# Altium PCB CareBoard_SMD_AUTOROUTER.PcbDoc
Units mil, origin at the board's own origin, x right, y up, seen from the top; angles counter-clockwise.
Board outline 6840 x 2601.5 mil, 2 copper layers (Top Layer, Bottom Layer); 72 components, 62 nets, 308 pads, 94 vias.
Unrouted connection lines stored in the file: 3.
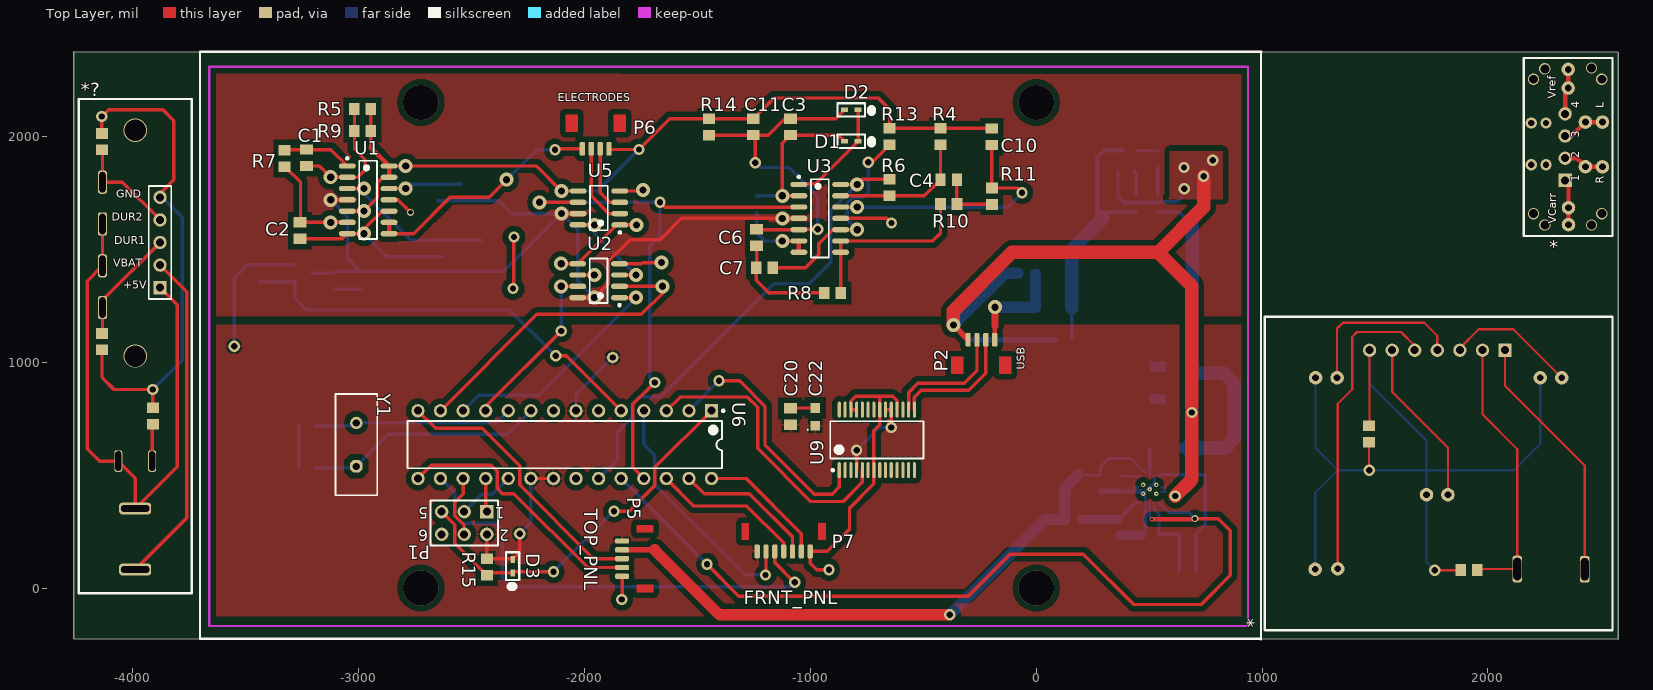
[diagram p0: Top Layer view]
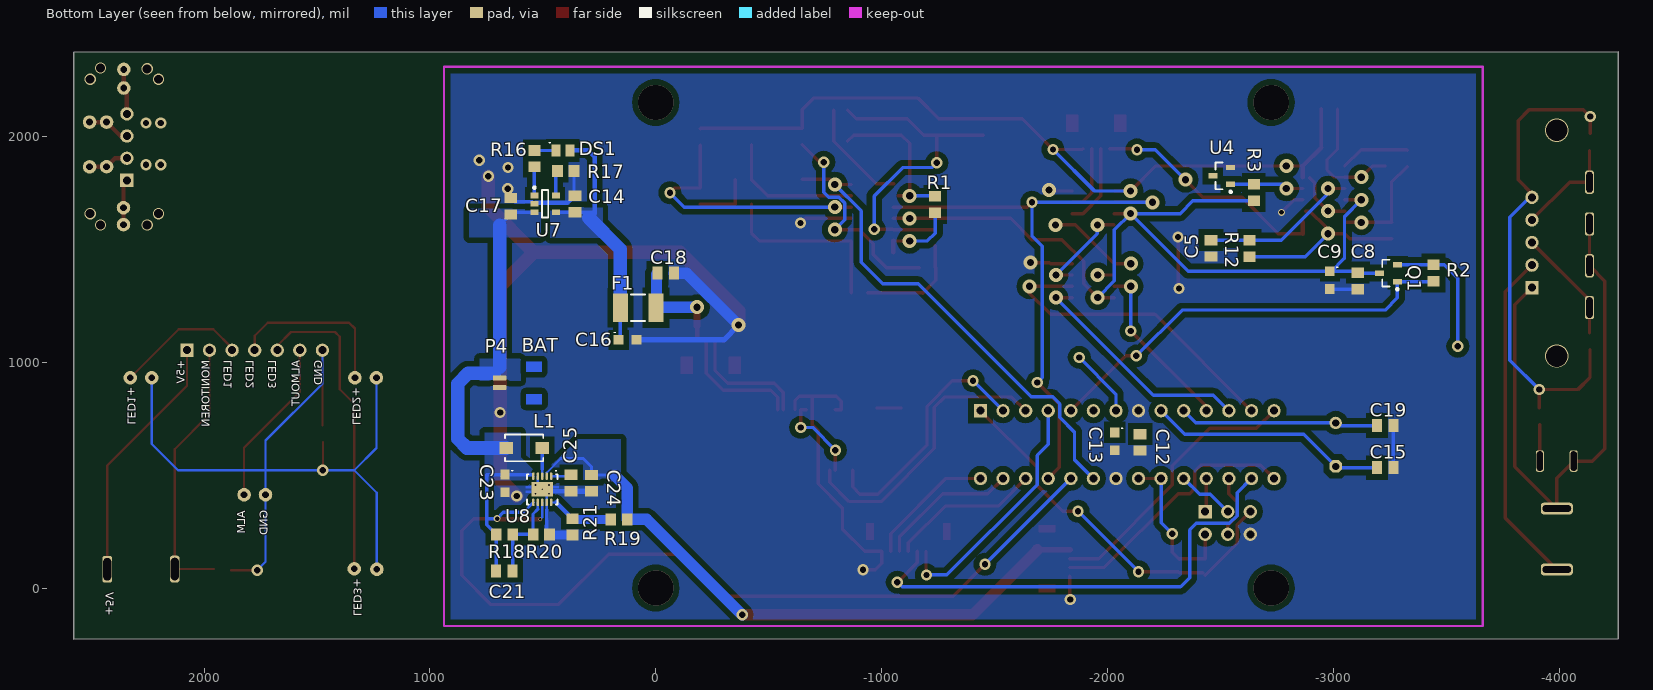
[diagram p1: Bottom Layer view, seen from below]

## Layer stack, top to bottom
Top Layer: signal copper 1.4
Dielectric: dielectric 12.6, FR-4, Dk 4.8
Bottom Layer: signal copper 1.4

## Board outline
-4262.5,-225 2577.5,-227.5 2577.5,2371.5 -4262.5,2374

## Design rules (kind name [scope] priority, off if disabled: settings)
Clearance Clearance_1 [All vs InPolygon] p1: gap=25
Clearance [All] p2: gap=5
ComponentClearance [All] p1: gap=20 collisioncheckmode=3 verticalgap=20 showdistances=TRUE
FanoutControl Fanout_Default [All] p5: bgadir=Out bgaviamode=Centered fanoutstyle=Auto fanoutdirection=OutOnly viagrid=1 // Fanout_Default (Default Rule)
MinimumAnnularRing [All] p1: minimumring=7
PolygonConnect PolygonConnect_1 [All vs IsNamedPolygon('+5V')] p1: connectstyle=Relief reliefconductorwidth=10 reliefentries=4 polygonreliefangle="90 Angle" airgapwidth=10
PolygonConnect [All] p2: connectstyle=Direct reliefconductorwidth=10 reliefentries=4 polygonreliefangle="90 Angle" airgapwidth=10
RoutingTopology [All] p1: topology=Horizontal
RoutingVias [All] p1: holewidth=32 width=62 viastyle="Through Hole" minholewidth=28 minwidth=50 maxholewidth=28 maxwidth=50
SilkToSilkClearance [All] p1: silktosilkclearance=5
SilkToSolderMaskClearance SilkscreenOverComponentPads [IsPad] p1: minsilkscreentomaskgap=10 clearancetoexposedcopper=TRUE
SolderMaskExpansion [All] p1: expansion=4
Width [All] p1: maxlimit=250 minlimit=10 preferedwidth=15
23 further rules are at their usual default settings.

## Classes and differential pairs
component class CaRe_Schematic_GARMENT_CONNECTOR: *
component class CaRe_Schematic_SMD_FRONT_PANEL: *
component class CaRe_Schematic_SMD_TOP_PANEL: *?

## Components (designator, comment, footprint, x,y, rotation, side; value= is the part's Value field where it differs from the comment)
* "GARMENT_CONNECTOR" GARMENT_DIN 2552,1559.1 r90 top
* "FRONT_PANEL" FRONT_PANEL 2552,1201 r180 top
*? "TOP_PANEL" TOP_PANEL -3740,-23 r90 top
C1 "SockCap" CAP0805 -3231.31,1905 r90 top
C2 "SockCap" CAP0805 -3260,1583 r270 top
C3 "SockCap" CAP0805 -1088,2041.9 r270 top
C4 "SockCap" CAP0805 -387.69,1808 r180 top
C5 "SockCap" CAP0805 -2459,1504 r90 bottom
C6 "SockCap" CAP0805 -1238,1552 r90 top
C7 "SockCap" CAP0805 -1203.21,1418 r180 top
C8 "SockCap" CAP0805 -3108.6,1359.68 r90 bottom
C9 "SockCapPol" 0805TANTCAP -2985,1363.13 r270 bottom
C10 "SockCap" CAP0805 -197,1998 r270 top
C11 "SockCap" CAP0805 -1253,2041.9 r270 top
C12 "SockCap" CAP0805 -2145,644.84 r270 bottom
C13 "SockCapPol" 0805TANTCAP -2032.51,649.76 r270 bottom
C14 "4.7uF" CAP0805 357.85,1700.42 r270 bottom
C15 "SockCap" CAP0805 -3230,533 r0 bottom
C16 "10uF" 0805TANTCAP 125,1099 r180 bottom
C17 "4.7uF" CAP0805 642,1691 r270 bottom
C18 "100nF" CAP0805 -44,1394.13 r0 bottom
C19 "SockCap" CAP0805 -3230,719.37 r0 bottom
C20 "SockCap" CAP0805 -1088.69,759.31 r90 top
C21 "100nF" CAP0805 670.58,76 r0 bottom
C22 "SockCapPol" 0805TANTCAP -978.69,758 r90 top
C23 "10uF" 0805TANTCAP 667.58,463 r270 bottom
C24 "22uF" CAP0805 284.58,464.58 r270 bottom
C25 "100nF" CAP0805 374.58,465 r90 bottom
D1 "BAT42W" SOD-523 -819,1977.9 r180 top
D2 "BAT42W" SOD-523 -819,2116.9 r180 top
D3 "BAT42W" SOD-523 -2319,97 r90 top
DS1 "CHIPLED_RED" CHIP_LED0805 411,1937.63 r180 bottom
F1 "MF-MSMF050-1" "MF-MSMF050 FOOTPRINT" 78,1241 r0 bottom
L1 "4.7uH" INDP4330X10N 582.58,620 r180 bottom
P1 "ICSP" HDR2X3 -2433,338 r180 top
P2 "USB" "JST 4-PIN SMD" -124.89,1108.17 r180 top
P4 "BAT" "JST-2 PIN SMD CONNECTOR" 707,988 r270 bottom
P5 "TOP_PNL" "JST 5 PIN SMD" -1844.17,268 r270 top
P6 "ELECTRODES" "JST 4-PIN SMD" -2069,1936 r0 top
P7 "FRNT_PNL" "JST-SH 7-PIN VERTICAL SMD" -1296,137 r0 top
Q1 "BSP304" SOT23_L -3245,1394.13 r0 bottom
R1 "SockRes" RES0805 -1237.69,1697.9 r270 bottom
R2 "SockRes" RES0805 -3444,1395.5 r90 bottom
R3 "SockRes" RES0805 -2648.31,1751 r270 bottom
R4 "SockRes" RES0805 -423.98,2000 r270 top
R5 "SockRes" RES0805 -2983.31,2121.71 r180 top
R6 "SockRes" RES0805 -649,1773 r90 top
R7 "SockRes" RES0805 -3328,1902.46 r270 top
R8 "SockRes" RES0805 -902,1307 r180 top
R9 "SockRes" RES0805 -2983.31,2023.69 r180 top
R10 "SockRes" RES0805 -387.69,1699.42 r180 top
R11 "SockRes" RES0805 -197,1735 r270 top
R12 "SockRes" RES0805 -2629,1504 r270 bottom
R13 "SockRes" RES0805 -649,2000 r270 top
R14 "SockRes" RES0805 -1450,2041.9 r270 top
R15 "1K" RES0805 -2433,93 r90 top
R16 "330" RES0805 538,1901.22 r270 bottom
R17 "2K" RES0805 398.27,1846.32 r0 bottom
R18 "2M" RES0805 669.58,238 r0 bottom
R19 "2M" RES0805 162.58,304 r180 bottom
R20 "220K" RES0805 506.58,238 r0 bottom
R21 "220K" RES0805 368.58,271 r90 bottom
U1 "TLV274IN" TI-D14_L -2958.31,1719 r0 top
U2 "XXXXX" SOIC-8 -1938,1361 r180 top
U3 "TLV274IN" TI-D14_L -958.69,1636.9 r0 top
U4 "LM4040" SOT23_L -2506.31,1825 r0 bottom
U5 "LT1920" LT-S8-8_L(LT1920) -1936.69,1683 r180 top
U6 "ATmega328P-PU" 28P3 -2088,635 r270 top
U7 "MCP73831T-2ADI/OT" SOT-23-OT5_L 490,1701.32 r180 bottom
U8 "TPS61200DRCT" DRC10-2400X1650TP 502.58,437 r270 bottom
U9 "FT232RL-Reel" SSOP-28_L(FTDI) -706,656 r90 top
Y1 "ECS-10-3-1" HC-49U -3011,635 r90 top

## Footprints (in the part's own frame and the unit in brackets; to place one, negate y for a bottom-side part, rotate by r counter-clockwise, add the part's x,y. Pads: shape width x height; smd on the part's side, far side on the other; paste and mask are expansions set on the pad)
28P3 [mm] "DIP, 28-Leads, Row Spacing 7.62mm, Pitch 2.54mm, Body 34.67x7.3mm"
  rect 1.5x1.5 hole 0.9: 1(-3.81,16.51)
  round 1.5 hole 0.9: 2(-3.81,13.97) 3(-3.81,11.43) 4(-3.81,8.89) 5(-3.81,6.35) 6(-3.81,3.81) 7(-3.81,1.27) 8(-3.81,-1.27) 9(-3.81,-3.81) 10(-3.81,-6.35) 11(-3.81,-8.89) 12(-3.81,-11.43) 13(-3.81,-13.97) 14(-3.81,-16.51) 15(3.81,-16.51) 16(3.81,-13.97) 17(3.81,-11.43) 18(3.81,-8.89) 19(3.81,-6.35) 20(3.81,-3.81) 21(3.81,-1.27) 22(3.81,1.27) 23(3.81,3.81) 24(3.81,6.35) 25(3.81,8.89) 26(3.81,11.43) 27(3.81,13.97) 28(3.81,16.51)
  silkscreen extent -3.93,-17.7 2.65,17.94, body extent -5.05,-18 5.05,18, height 8.89
0805TANTCAP [mm] "0805 TANTALUM CAPACITOR MOLDED"
  rect 1.1x1.05 smd: 1(-1,0) 2(1,0)
  silkscreen extent -1.5,0.77 -1.4,0.87, body extent -1,-0.62 1,0.63, height 0.78
CAP0805 [mm] "Chip Capacitor 0805 Package"
  rect 1.15x1.45 smd: 1(-0.925,0) 2(0.925,0)
  body extent -1,-0.62 1,0.63, height 0.78
CHIP_LED0805 [mm] "LED 0805"
  rect 1x1.35 smd: 1(-0.775,0) 2(0.775,0)
  silkscreen extent -1.54,0.84 -1.44,0.94, body extent -1.07,-0.7 1.07,0.7, height 1.1
DRC10-2400X1650TP [mm] "SON, 10-Leads, Body 3x3mm, Pitch 0.5mm, Thermal Pad 2.4x1.65mm, TI Recommended"
  oval 0.85x0.28 smd paste-0.025 mask+0.07: 1(-1.475,1) 2(-1.475,0.5) 3(-1.475,0) 4(-1.475,-0.5) 5(-1.475,-1) 6(1.475,-1) 7(1.475,-0.5) 8(1.475,0) 9(1.475,0.5) 10(1.475,1)
  rect 1.65x2.4 smd paste-0.825 mask+0.07: 11(0,0)
  Top Layer region: -0.393,-1.2 -0.113,-1.2 -0.113,-1.9 -0.393,-1.9
  Top Layer region: 0.387,-1.9 0.107,-1.9 0.107,-1.2 0.387,-1.2
  Top Layer region: 0.387,1.2 0.107,1.2 0.107,1.9 0.387,1.9
  Top Layer region: -0.393,1.9 -0.113,1.9 -0.113,1.2 -0.393,1.2
  silkscreen extent -2.15,-1.7 1.7,1.7, body extent -1.55,-1.55 1.55,1.55, height 1
FRONT_PANEL [mil]
  rrect50% 43.31x118.11 hole 35.43 slot 98.43 at 90 deg: 0(123,1118) 0(422,1117)
  rect 59.06x59.06 hole 35.43: 1(476,148)
  rect 47.24x53.15 smd: 1(672.42,1122) 2(599.58,1122)
  rect 53.15x47.24 smd: 1(1078,482) 2(1078,554.83)
  round 59.06 hole 35.43: 2(576,148) 3(676,148) 4(776,148) 5(876,148) 6(976,148) 7(1076,148)
  round 60 hole 30: 7(225,270) 7(824,788) 7(1217,1116) 7(1220,270) 8(320,270) 8(729,788) 8(1315,270) 8(1317,1118)
  Top Layer lines w10: 1220,270 1220,52 1194,26 834,26 776,84 776,148 ; 1217,1116 1217,385 1153,321 1153,88 1132,67 937,67 876,128 876,148 ; 1078,679 1078,554.83 ; 1076,480 1076,148 ; 976,200 976,148 976,333 729,580 729,788 ; 787,1122 672.42,1122 ; 676,148 676,138 593,55 440,55 225,270 ; 594.58,1117 422,1117 422,586 576,432 576,148 ; 476,148 476,305 123,658 123,1118
  Bottom Layer lines w10: 1317,1118 1317,779 1217,679 ; 1315,270 1315,581 1217,679 ; 1076,148 1076,296 824,548 824,788 824,1085 787,1122 ; 320,270 320,563 436,679 1217,679
  body extent 0,0 1540,1390, height 31
GARMENT_DIN [mil]
  rect 59.06x59.06 hole 35.43: 1(245.93,210)
  round 59.06 hole 35.43: 2(344.13,210) 3(442.33,210) 4(540.53,210)
  round 60 hole 30: 6(50,195) 6(306.03,45) 6(504.37,45) 6(737.4,196.5) 7(125,195) 7(306.67,120) 7(504.37,120) 7(655,196.5)
  Top Layer lines w19.68: 140,210 125,195 ; 344.13,210 344.13,157.46 306.03,119.37 306.03,45 ; 442.33,210 442.33,182.04 504.37,120 504.37,45 ; 540.53,210 641.5,210 655,196.5 737.4,196.5 ; 50,195 125,195 ; 230.93,195 125,195
  silkscreen extent 0,0 787,394
HC-49U [mm] "Quartz Crystal, Thru-Hole; 2 Leads; Body 11.35 x 4.65 x 13.46 mm (LxWxH max)"
  oct 1.4x1.4 hole 0.8: 1(-2.44,0)
  round 1.4 hole 0.8: 2(2.44,0)
  silkscreen extent -5.7,-2.35 5.7,2.35, body extent -5.59,-2.36 5.58,2.31, height 13.49
HDR2X3 [mm] "Connector; Header; 3x2 Position"
  rect 1.5x1.5 hole 0.9: 1(0,0)
  round 1.5 hole 0.9: 2(0,2.54) 3(2.54,0) 4(2.54,2.54) 5(5.08,0) 6(5.08,2.54)
  silkscreen extent -1.27,-1.27 6.35,3.81
INDP4330X10N [mm] "Precision Wire Wound Inductor, 2-Leads, Body 4.30x3.00mm, IPC Medium Density"
  rect 1.55x1.4 smd: 1(-2.025,0) 2(2.025,0)
  silkscreen extent -2.15,-1.5 2.15,1.52
"JST 4-PIN SMD" [mm] "BM04B-SRSS-TB"
  rrect50% 0.6x1.55 smd: 1(1.499,0.229) 2(2.498,0.229) 3(3.497,0.229) 4(4.496,0.229)
  Top Layer region: -0.406,2.134 1.016,2.134 1.016,4.089 -0.406,4.089
  Top Layer region: 5.004,2.134 6.426,2.134 6.426,4.089 5.004,4.089
  body extent 0,0 6,3.6, height 4.25
"JST 5 PIN SMD" [mil] "BM05B-SRSS-TB"
  rrect50% 23.62x61.02 smd: 1(60,10) 2(99,10) 3(138,10) 4(177,10) 5(216,10)
  Top Layer region: 252,75 287,75 287,150 252,150
  Top Layer region: -12,75 23,75 23,150 -12,150
  body extent 0,0 276,142
"JST-2 PIN SMD CONNECTOR" [mm] "SM02B-SRSS-TB"
  rrect50% 0.6x1.55 smd: 1(1.473,0.406) 2(2.54,0.406)
  Top Layer region: -0.381,5.156 0.819,5.156 0.819,3.356 -0.381,3.356
  Top Layer region: 3.245,5.156 4.445,5.156 4.445,3.356 3.245,3.356
  body extent 0,0 4,4.95, height 3.01
"JST-SH 7-PIN VERTICAL SMD" [mm]
  rrect50% 0.6x1.55 smd: 1(1.524,0.635) 2(2.519,0.635) 3(3.514,0.635) 4(4.508,0.635) 5(5.503,0.635) 6(6.498,0.635) 7(7.493,0.635)
  Top Layer region: -0.254,1.905 0.635,1.905 0.635,3.81 -0.254,3.81
  Top Layer region: 8.382,1.905 9.271,1.905 9.271,3.81 8.382,3.81
  body extent 0,0.21 9,3.81, height 4.25
LT-S8-8_L(LT1920) [mm] "SOIC, 8-Leads, Body 4.9x3.9mm, Pitch 1.27mm, IPC High Density"
  oval 1.9x0.6 smd: 1(-2.35,1.905) 2(-2.35,0.635) 3(-2.35,-0.635) 4(-2.35,-1.905) 5(2.35,-1.905) 6(2.35,-0.635) 7(2.35,0.635) 8(2.35,1.905)
  silkscreen extent -2.48,-2.5 1,2.88, body extent -3,-2.45 3,2.45, height 1.75
"MF-MSMF050 FOOTPRINT" [mm] "PTC FUSE"
  rect 1.7x3.2 smd: 1(-2,0) 2(2,0)
  silkscreen extent -0.8,-1.5 0.8,1.5, body extent -2.37,-1.71 2.36,1.71, height 0.85
RES0805 [mm] "Chip Resistor, 2-Leads, Body 2.00x1.25mm, IPC Medium Density"
  rect 1.2x1.35 smd: 1(-0.925,0) 2(0.925,0)
  body extent -1,-0.62 1,0.63, height 0.78
SOD-523 [mm]
  rect 0.8x0.5 smd: 1(-0.762,0) 2(0.762,0)
  silkscreen extent -2.29,-0.76 1.55,0.74, body extent -0.91,-0.42 0.91,0.42, height 0.71
SOIC-8 [mm] "SOIC, 8-Leads, Body 4.9x3.9mm, Pitch 1.27mm, IPC High Density"
  oval 1.9x0.6 smd: 1(-2.35,1.905) 2(-2.35,0.635) 3(-2.35,-0.635) 4(-2.35,-1.905) 5(2.35,-1.905) 6(2.35,-0.635) 7(2.35,0.635) 8(2.35,1.905)
  silkscreen extent -2.48,-2.5 1,2.88, body extent -3,-2.45 3,2.45, height 1.75
SOT23_L [mm] "SOT23, 3-Leads, Body 2.9x1.3mm, Pitch 0.95mm, Lead Span 2.3mm, IPC High Density"
  rect 1x0.6 smd: 1(-1,0.95) 2(-1,-0.95) 3(1,0)
  silkscreen extent -1.12,-1.5 0.7,1.92, body extent -1.27,-1.52 1.27,1.48, height 1.1
SOT-23-OT5_L [mm] "SOT23, 5-Leads, Body 2.9x1.6mm, Pitch 0.95mm, Lead Span 2.7mm, IPC High Density"
  rect 0.9x0.65 smd: 1(-1.2,0.95) 2(-1.2,0) 3(-1.2,-0.95) 4(1.2,-0.95) 5(1.2,0.95)
  silkscreen extent -1.33,-1.55 0.35,1.95, body extent -1.53,-1.5 1.53,1.5, height 1.45
SSOP-28_L(FTDI) [mm] "SOP, 28-Leads, Body 10.2x5.3mm, Pitch 0.65mm, IPC High Density"
  oval 1.8x0.35 smd: 1(-3.4,4.225) 2(-3.4,3.575) 3(-3.4,2.925) 4(-3.4,2.275) 5(-3.4,1.625) 6(-3.4,0.975) 7(-3.4,0.325) 8(-3.4,-0.325) 9(-3.4,-0.975) 10(-3.4,-1.625) 11(-3.4,-2.275) 12(-3.4,-2.925) 13(-3.4,-3.575) 14(-3.4,-4.225) 15(3.4,-4.225) 16(3.4,-3.575) 17(3.4,-2.925) 18(3.4,-2.275) 19(3.4,-1.625) 20(3.4,-0.975) 21(3.4,-0.325) 22(3.4,0.325) 23(3.4,0.975) 24(3.4,1.625) 25(3.4,2.275) 26(3.4,2.925) 27(3.4,3.575) 28(3.4,4.225)
  silkscreen extent -3.52,-5.25 2.1,5.25, body extent -3.88,-5.12 3.88,5.21, height 2.16
TI-D14_L [mm] "SOIC, 14-Leads, Body 8.65x3.9mm, Pitch 1.27mm, IPC High Density"
  oval 1.9x0.6 smd: 1(-2.35,3.81) 2(-2.35,2.54) 3(-2.35,1.27) 4(-2.35,0) 5(-2.35,-1.27) 6(-2.35,-2.54) 7(-2.35,-3.81) 8(2.35,-3.81) 9(2.35,-2.54) 10(2.35,-1.27) 11(2.35,0) 12(2.35,1.27) 13(2.35,2.54) 14(2.35,3.81)
  silkscreen extent -2.47,-4.4 1,4.78, body extent -2,-4.38 2,4.38, height 1.75
TOP_PANEL [mm]
  rect 1.2x1.35 smd: 1(20.864,4.369) 1(29.221,10.084) 1(49.864,10.109) 2(19.014,4.369) 2(27.371,10.084) 2(51.714,10.109)
  rect 1.5x1.5 hole 0.9: 1(34.366,3.556)
  round 1.5 hole 0.9: 2(36.906,3.556) 3(39.446,3.556) 4(41.986,3.556) 5(44.526,3.556)
  rrect50% 1.3x3.6 hole 0.762 slot 3.2 at 90 deg: 9(2.667,6.35) 9(9.525,6.35)
  rrect50% 2.4x0.9 hole 0.65 slot 2.2 at 0 deg: 11(14.859,4.445) 11(14.859,8.255)
  rrect50% 2.6x1 hole 0.7 slot 2.3 at 0 deg: 15(32.131,10.033) 15(36.83,10.033) 15(41.529,10.033) 15(46.228,10.033)
  Top Layer lines w0.381: 51.714,10.109 53.619,10.109 54.381,9.347 54.381,3.226 53.162,2.007 46.507,2.007 44.958,3.556 44.526,3.556 ; 27.371,10.084 25.4,10.084 24.257,10.084 22.911,8.738 22.911,4.369 20.864,4.369 ; 29.271,10.033 32.131,10.033 32.969,10.033 39.446,3.556 ; 41.529,10.033 36.83,10.033 35.103,11.76 16.256,11.76 14.859,10.363 14.859,8.255 12.954,6.35 9.525,6.35 14.249,1.626 32.436,1.626 34.366,3.556 ; 49.788,10.033 46.228,10.033 46.228,7.798 41.986,3.556 ; 2.667,6.35 8.458,0.559 33.909,0.559 36.906,3.556 ; 14.859,4.445 18.938,4.445
  Bottom Layer lines w0.381: 22.911,4.369 26.213,1.067 42.291,1.067 44.526,3.302 ; 44.526,3.302 44.526,3.556 44.526,3.302
  silkscreen extent 33.1,2.29 45.8,4.83, body extent 0,0 55.37,12.7, height 0.78

## Part data
C1 C2 C3 C4 C5 C6 C7 C8 C10 C11 C12 C15 C19 C20: "Capacitor"
C9 C13 C22: "Polarized Capacitor (Axial)"
C14 C17 C18 C21 C24 C25: library part "Chip Cap", "Capacitor"
C16 C23: library part "Cap Tant", "Polarized Capacitor (Radial)"
D1 D2 D3: "Schottky Diode"
DS1: "Typical RED LED"
F1: library part "PTC Fuse", "PTC Resettable Fuse 500 mA"
L1: library part Inductor, "Inductor"
P1: library part "Header 3X2", "Header, 3-Pin, Dual row"
P2 P6: library part "Header 4", "Header, 4-Pin"
P4: library part "Header 2", "Header, 2-Pin"
P5: library part "Header 5", "Header, 5-Pin"
P7: library part "Header 7", "Header, 7-Pin"
Q1: "P-channel Enhancement Mode Vertical D-MOSFET"
R1 R2 R3 R4 R5 R6 R7 R8 R9 R10 R11 R12 R13 R14: "Resistor"
R15 R16 R17 R18 R19 R20 R21: library part "Chip Res", "Resistor"
U1 U3: "JFET-Input Operational Amplifier"
U2: library part DS1804-050, "Nonvolatile Trimmer Potentiometer"
U4: "Precision Micropower Shunt Voltage Reference, 0.1% accuracy, 2.5 V, 15 ppm / degC, 15 mA, -40 to 85 degC, 3-pin SOT-23 (DBZ), Green (RoHS & no Sb/Br)"
U5: library part AD620AN, "Low-Cost, Low-Power Instrumentation Amplifier"
U6: "8-bit AVR Microcontroller, 32KB Flash, 1KB EEPROM, 2KB SRAM, 28-pin PDIP, Industrial Grade (-40°C to 85°C)"
U7: "Miniature Single-Cell, Fully Integrated Li-Ion, Li-Polymer Charge Management Controller, 4.2V, 5-Pin SOT-23, Industrial Temperature, Tape and Reel"
U8: "Boost Voltage Converter with 0.3 to 5.5 V Input and 1.8 to 5.5 V Output, -40 to 85 degC, 10-Pin SON (DRC), Green (RoHS & no Sb/Br)"
U9: "USB UART Asynchronous Serial Data Transfer Chip, SSOP-28, Tape and Reel"
Y1: library part ECS-10-13-1, "Crystal Oscillator"

## Via types
v1: diameter 50, hole 28, Top Layer to Bottom Layer, 41 vias
v2: diameter 62, hole 32, Top Layer to Bottom Layer, 31 vias
v3: diameter 50, hole 39.37, Top Layer to Bottom Layer, 8 vias
v4: diameter 19.68, hole 7.87, Top Layer to Bottom Layer, 5 vias
v5: diameter 157/157 (per signal layer), hole 157, Top Layer to Bottom Layer, 4 vias
v6: diameter 30, hole 20, Top Layer to Bottom Layer, 2 vias
v7: diameter 102.36, hole 94.49, Top Layer to Bottom Layer, 2 vias
v8: diameter 15, hole 12, Top Layer to Bottom Layer, 1 vias

## Nets (pads, with @x,y where several pads share a name; then routed paths per layer and width w, separated by ;. In a path a pad name is that pad's centre, name@x,y a point inside that pad or via, vN(x,y) a via of type N, cw(c..) or ccw(c..) an arc to the next point about the centre after c; other vN are vias at no path point)
+3.3V: U9.17
+5V: C12.1 C13.1 C20.1 C22.1 D3.2 P1.2 P5.1 P7.1 Q1.2 R2.2 R15.2 U6.7 U6.20 U6.21 U9.4 U9.19 U9.20 | length 1996.4
  Top Layer w15: P1.2 R15.2 D3.2@-2321.42,129.42 ; D3.2 -2287,159 v1(-2287,240.17) ; U6.20 U6.21 ; U9.4 v1(-795.57,610.39) ; U9.20 U9.19 v1(-642.02,711.02)
  Bottom Layer w15: v1(-3552,1071) -3552,1372 -3492.08,1431.92 R2.2 -3284.76,1431.92 Q1.2 ; v1(-2287,240.17) -2238,289.17 U6.20 ; U6.7 -2038,859.02 v1(-1876,1021.02) ; v1(-795.57,610.39) -694.94,711.02 v1(-642.02,711.02)
ALMOUT: P7.6 U6.28 | length 577.4
  Top Layer w15: U6.28 -1285,485 -1040.17,240.17 P7.6
ATRX: U6.2 U9.1 | length 1116.9
  Top Layer w15: v1(-1405,918) -1314,918 -1201.42,805.42 -1201.42,633.58 -983.84,416 -904,416 -872.34,447.66 U9.1
  Bottom Layer w15: U6.2 v1(-1405,918)
ATTX: U6.3 U9.5 | length 1280.9
  Top Layer w15: U6.3 -1577.38,845.62 -1278.62,845.62 -1234,801 -1234,618 -999,383 -855.75,383 -769.98,468.77 U9.5
AVCC_CTRL: Q1.1 R2.1 U6.5 | length 1886.2
  Top Layer w15: v1(-2128,1028) -2081,1028 U6.5
  Bottom Layer w15: R2.1 -3441.64,1356.72 Q1.1 -3284.37,1284.37 -3231,1231 -2331,1231 v1(-2128,1028)
AVS: C8.2 C9.1 Q1.3 R3.2 U1.4 U2.8 U3.4 U5.7 | length 3913.6
  Top Layer w15: v2(-3124.24,1719) U1.4 ; v2(-2102.61,1658) U5.7 ; U2.8 v2(-1957.12,1286) -1895.38,1347.74 -1895.38,1446.07 -1798.45,1543 -1665,1543 -1571.1,1636.9 v2(-1124.61,1636.9) U3.4
  Bottom Layer w15: Q1.3 -3110.57,1394.13 C8.2 -3102.2,1402.5 C9.1@-2993.06,1402.5 ; v2(-3124.24,1719) -3050,1644.76 -3050,1459.44 -3047.63,1457.07 C9.1@-2993.06,1402.5 ; R3.2 -2378.58,1714.58 -2322,1658 v2(-2102.61,1658) ; v2(-1957.12,1286) -2031,1359.88 -2031,1586.39 v2(-2102.61,1658) ; C9.1@-2993.06,1402.5 C9.1 -2358.11,1402.5 v2(-2102.61,1658)
BATSTAT: U6.6
D+: P2.2 U9.15 | length 563.4
  Top Layer w15: U9.15 -539.66,845.34 -509,876 -299,876 -223.23,951.77 P2.2
D-: P2.3 U9.16 | length 555.4
  Top Layer w15: U9.16 -565.25,865.75 -524,907 -318,907 -262.56,962.44 P2.3
DUR1: P5.3 U6.14 | length 1224.1
  Top Layer w15: U6.14 -2660,707 -2454.21,707 -2288,540.79 -2288,457.22 -1960.78,130 P5.3
DUR2: P5.4 U6.15 | length 1161
  Top Layer w15: U6.15 -2679,544 -2413,544 -2387,518 -2387,441 -2364,418 -2313,418 -1986,91 P5.4
GAINFBK: U3.3 U5.6 U6.25 | length 2640
  Top Layer w15: v2(-2200,1708) U5.6 ; U6.25 -1787,534 -1787,813 v1(-1690,910) ; v1(-1666,1708) -1644.9,1686.9 U3.3
  Bottom Layer w15: v2(-2200,1708) v1(-1666,1708) -1666,1559.13 -1712,1513.13 -1712,932 v1(-1690,910)
GND: C5.1 C8.1 C9.2 C12.2 C13.2 C14.1 C15.1 C16.2 C17.1 C18.1 C19.1 C20.2 C22.2 C23.2 C24.2 C25.1 P1.6 P2.4 P4.2 P5.5 P7.7 R17.1 R20.1 R21.1 U1.11 U2.4 U3.11 U4.2 U5.4 U6.8 U6.22 U7.2 U8.4 U8.9 U8.11 U9.7 U9.18 U9.21 U9.25 U9.26 | length 7279
  Top Layer w15: U1.11 -2826.55,1719 v6(-2771,1663.45) ; v1(-2317.07,1326) -2313,1330.07 v1(-2313,1554) ; U2.4 -1748.25,1436 -1743.25,1441 v2(-1659.49,1441) ; U5.4 v2@-1746.93,1758 ; v1(-1835,-51) -1834.17,-50.17 P5.5 ; C20.2@-1087.04,797.37 C22.2 ; v1(-918,81) -973,81 -1001,109 P7.7 -925.03,162 -827,260.03 -827,353.05 -718.8,461.26 U9.7 -718.8,696.41 -693.2,722 U9.21 -693.2,846.59 -695.62,849 ; U3.11 -661.9,1636.9 v1(-641,1616) ; U9.25 U9.26 -821.16,827.84 -800,849 -695.62,849 ; U9.18 -616.43,829.16 -636.27,849 -695.62,849
  Top Layer w25: v2(-366.89,1164.17) P2.4
  Top Layer w60: v2(-366.89,1164.17) -366.89,1227.11 -108,1486 540,1486 ; v1(616,407.47) 689.27,480.74 v1(689.27,777) ; 689,802 689,1337 540,1486 ; v1(741,1824) 741,1687 540,1486
  Bottom Layer w10: C9.2@-2985.5,1323.26 C9.2 ; v4(473.05,417.31) 482.9,407.47 482.9,346.88 ; U8.11@522.27,466.53 U8.4
  Bottom Layer w15: C15.1 C19.1 ; C8.1 C9.2@-2985.5,1323.26 ; v1@-2313,1547 v1(-2313,1554) ; R17.1 361.85,1740.83 C14.1 389.69,1705 ; U8.11@461.78,428.58 v4(473.05,417.31) ; R20.1@482.9,250.73 482.9,346.88 ; U8.11@482.9,427.16 U8.11@522.27,466.53 ; U7.2@533.56,1705 U7.2 ; U7.2@545.92,1710 624.58,1710 C17.1
  Bottom Layer w20: C25.1 U8.11@461.78,428.58 ; 389.69,1705 U7.2@533.56,1705
  Bottom Layer w25: v2(-366.89,1164.17) -301.72,1099 C16.2 ; C24.2 C25.1@374.16,428.16
  Bottom Layer w40: R21.1 R20.1@466.75,234.58
  Bottom Layer w50: v2(-366.89,1164.17) -136.94,1394.13 C18.1
  other v1: 655.48,1768.63 654,1862.4 781,1894
  other v2: -1741.93,1763
  other v4: 532.11,417.31 502.58,437 473.05,456.68 532.11,456.68
LED1: P7.3 U6.16 | length 2131.8
  Top Layer w15: P7.3 -1157.67,112.98 -1070.69,26 v1(-1070,26)
  Bottom Layer w15: U6.16 -2575.03,422.03 -2575.03,320.59 -2540.44,286 -2393,286 -2364,257 -2364,45 -2324,5 -1091,5 v1(-1070,26)
LED2: P7.4 U6.26 | length 675.8
  Top Layer w15: U6.26 -1516,363 -1281,363 -1118.5,200.5 P7.4
LED3: P7.5 U6.27 | length 630.7
  Top Layer w15: U6.27 -1471,418 -1270,418 -1079.33,227.33 P7.5
MISO: P1.1 U6.18 | length 149.1
  Top Layer w15: U6.18 -2438,343 P1.1
MONITOREN: P7.2 U6.4 | length 1108.3
  Top Layer w15: v1(-1198.63,58) -1196.83,59.8 P7.2
  Bottom Layer w15: U6.4 -1738,636 -1689,587 -1689,457.6 -1289.4,58 v1(-1198.63,58)
MOSI: P1.4 U6.17 | length 279.7
  Top Layer w15: U6.17 -2538,417.06 -2575.03,380.03 -2575.03,320.59 -2533,278.56 P1.4
NetC1_1: C1.1 R5.2 R9.2 U1.2 | length 582.2
  Top Layer w13: U1.2 -3004.59,1819 -2973.25,1850.34 -2973.25,1897.25 -3019.73,1943.73 R9.2 R5.2
  Top Layer w15: C1.1 -3173.82,1868.58 v2(-3124.24,1819) U1.2
NetC1_2: C1.2 R7.1 U1.1 | length 308.2
  Top Layer w15: R7.1 -3325.46,1941.42 C1.2 -3123.25,1941.42 U1.1
NetC2_1: C2.1 R7.2 U1.6 | length 485.8
  Top Layer w15: R7.2 -3258,1796.05 -3258,1621.42 C2.1 -3124.65,1619.42 v2(-3124.24,1619) U1.6
NetC2_2: C2.2 R12.2 U1.7 U1.10 | length 835
  Top Layer w15: C2.2 -3073.25,1546.58 U1.7 v2(-2977.43,1569) -2966,1580.43 -2966,1599.76 -2896.76,1669 U1.10@-2877.43,1669
  Bottom Layer w15: v2(-2977.43,1569) -2876.02,1467.58 R12.2
NetC3_1: C3.1 C6.2 C11.2 D2.2 R14.2 U3.5 | length 1530.8
  Top Layer w15: R14.2 C11.2 ; v1(-1244,1882.78) -1244,1996.48 C11.2 ; C6.2 -1236.48,1586.9 U3.5 -1049.1,1589 v1(-967,1589) ; D2.2 -887.58,2078.31 -1113.69,2078.31 -1186.52,2005.48 C11.2
  Bottom Layer w15: v1(-1244,1882.78) -1223.22,1862 -1093.14,1862 -967,1735.86 v1(-967,1589)
NetC3_2: C3.2 D1.2 R1.1 U3.2 | length 699.2
  Top Layer w15: U3.2@-1073.69,1736.9 v2(-1124.61,1736.9) -1124.61,1968.87 C3.2 -876.58,2005.48 D1.2
  Bottom Layer w15: R1.1 -1235.1,1736.9 v2(-1124.61,1736.9)
NetC4_1: C4.1 R10.1 R11.2 | length 263.2
  Top Layer w15: C4.1 R10.1 -350.43,1698.58 R11.2
NetC4_2: C4.2 R4.2 R6.1 U3.13 | length 627.4
  Top Layer w15: U3.13 -865.85,1736.58 R6.1 -495.52,1736.58 C4.2 -423.98,1808.12 R4.2
NetC5_2: C5.2 R12.1 U1.3 | length 699.4
  Top Layer w13: U1.3@-3051.42,1768.42 U1.3
  Top Layer w15: U1.3 v2(-2977.43,1769)
  Bottom Layer w15: v2(-2977.43,1769) -2977.43,1748.43 -2769.42,1540.42 R12.1 C5.2
NetC6_1: C6.1 C7.2 R8.2 | length 477.3
  Top Layer w15: C6.1 -1238,1419.63 C7.2 -1239.63,1362.63 -1183,1306 ; -1182,1307 R8.2
NetC7_1: C7.1 R13.2 U3.10 | length 981.1
  Top Layer w15: C7.1 -1021.83,1418 -963,1476.83 -963,1525 -901.1,1586.9 U3.10 v2(-792.76,1586.9) ; v1(-744,1886) -726.58,1886 R13.2
  Bottom Layer w15: v2(-792.76,1586.9) -836.26,1630.4 -836.26,1704.92 -810.78,1730.4 -765.6,1730.4 -744,1752 v1(-744,1886)
NetC10_2: C10.2 R11.1 U3.12 | length 1162.3
  Top Layer w15: U3.12 v2(-792.76,1686.9) ; C10.2 R11.1 -83.62,1771.42 v1(-63,1750.8)
  Bottom Layer w15: v2(-792.76,1686.9) -126.9,1686.9 v1(-63,1750.8)
NetC25_2: C25.2 U8.1 | length 82.3
  Bottom Layer w10: C25.2@380.93,495.07 U8.1
NetD1_1: D1.1 D2.1 U3.1 | length 482.4
  Top Layer w15: U3.1@-1054.69,1790.38 -976.52,1790.38 D1.1 D2.1
NetDS1_1: DS1.1 R16.1 | length 96.5
  Bottom Layer w15: DS1.1 R16.1
NetL1_2: L1.2 U8.3 | length 124.7
  Bottom Layer w10: U8.3 502.58,524.72
  Bottom Layer w15: 502.86,525 L1.2
NetR1_2: R1.2 U3.6 U3.7 | length 340.9
  Top Layer w15: v2(-1124.61,1536.9) U3.6
  Top Layer w20: U3.7 U3.6
  Bottom Layer w15: R1.2 -1237.69,1571.37 -1203.21,1536.9 v2(-1124.61,1536.9)
NetR3_1: R3.1 U1.12 U4.1 | length 327.8
  Top Layer w15: U1.12 v2(-2792.39,1769)
  Bottom Layer w15: v2(-2792.39,1769) -2773.98,1787.42 R3.1 -2545.87,1787.42 U4.1
NetR8_1: R8.1 R10.2 U3.8 U3.9 | length 813.4
  Top Layer w15: -866.17,1363.58 U3.8 U3.9 -459.1,1536.9 -424.1,1571.9 R10.2 ; R8.1 -865.58,1363
NetR16_2: R16.2 U7.1 | length 126.4
  Bottom Layer w15: U7.1 538,1739.48 R16.2
NetR17_2: R17.2 U7.5 | length 110.9
  Bottom Layer w15: R17.2 442.75,1838.25 U7.5
NetR19_1: R19.1 R21.2 U8.10 | length 295.2
  Bottom Layer w10: 440.1,378.93 U8.10
  Bottom Layer w13: R21.2@365.17,304 R21.2
  Bottom Layer w20: R21.2 440.1,378.93
  Bottom Layer w40: R19.1 R21.2@365.17,304
POTCS: U2.7 U6.11 | length 762.8
  Top Layer w15: U6.11 -2438,804 v1(-2103.92,1138.08) ; v2(-2103.92,1336) U2.7
  Bottom Layer w15: v1(-2103.92,1138.08) v2(-2103.92,1336)
POTINC: U2.1 U6.12 | length 1046.8
  Top Layer w15: U2.1 v2(-1772.08,1286)
  Bottom Layer w15: U6.12 -2469,854 -2204.08,854 v2(-1772.08,1286)
POTU/D: U2.2 U6.13 | length 1420.1
  Top Layer w15: U6.13 -2211,1212 -1748.24,1212 -1654.74,1305.5 v2(-1654.74,1336) U2.2
RESET: D3.1 P1.5 R15.1 U6.1 | length 1693.1
  Top Layer w15: P1.5 -2575.03,280.03 -2575.03,198.61 R15.1 ; R15.1@-2422.58,67 D3.1 -2314,72 v1(-2138,72) ; v1(-1870,340) -1803,340 -1689,454 -1689,534 U6.1
  Bottom Layer w15: v1(-2138,72) v1(-1870,340)
RGH: U2.3 U5.8 | length 444.9
  Top Layer w15: U5.8 v2(-1955.8,1608) ; U2.3 v2(-1772.08,1386)
  Bottom Layer w15: v2(-1955.8,1608) -1955.8,1569.72 v2(-1772.08,1386)
RGL: U2.6 | length 73.4
  Top Layer w15: U2.6 v2(-1957.12,1386)
RGW: U2.5 U5.1 | length 404.4
  Top Layer w15: v2(-2103.92,1436) U2.5 -1858.52,1608 U5.1 v2(-1770.76,1608)
SCK: P1.3 U6.19 | length 255.9
  Bottom Layer w15: P1.3 -2456,415 -2408,415 U6.19
"UVLO 2.6V": C21.1 R18.1 R20.2 U8.7 | length 400.7
  Bottom Layer w10: 522.27,348.88 U8.7
  Bottom Layer w13: 522.27,348.88 543,328.15 R20.2
  Bottom Layer w15: R20.2 R18.1 C21.1@633.16,77
VBAT: C17.2 C21.2 C23.1 L1.1 P4.1 R18.2 U6.24 U7.3 U8.5 U8.6 U8.8 | length 6163.8
  Top Layer w15: v1(-1458,105) -1317,-36 -302.35,-36 -116.35,150 209,150 432,-73 730,-73 859,56 859,253.86 805.45,307.42 v6(702.58,307.42)
  Top Layer w20: v8(511.58,305) v6@700.17,305
  Bottom Layer w10: U8.8 502.9,378.62 502.9,313.69 v8(511.58,305) ; U8.5 549.25,502.37
  Bottom Layer w13: U8.6 585.88,335
  Bottom Layer w15: U6.24 v1(-1458,105) ; U7.3 632.66,1663.92 C17.2 691,1605.58 ; 549.25,502.37 748.16,502.37 748.16,280.16 R18.2 C21.2@706,77 ; 585.88,335 675,335 v6(702.58,307.42) 747.74,307.42
  Bottom Layer w50: 691,977 716,952
  Bottom Layer w60: L1.1 836,620 877,661 877,905 830,952 716,952 ; 691,977 691,1605.58
VBUS: C14.2 C16.1 DS1.2 F1.2 U7.4 | length 1160.2
  Bottom Layer w15: C16.1@156.74,1106.63 F1.2 ; 271,1657 296,1657 ; 271,1664 C14.2 442.67,1664 U7.4
  Bottom Layer w20: 271,1657 271,1664 271,1909 299.63,1937.63 DS1.2
  Bottom Layer w60: F1.2 156.74,1499.74 296,1639
VCARRIER: P6.1 U1.8 U1.9 | length 1065.8
  Top Layer w15: U1.8 -2757,1569 -2596,1730 -2422,1730 -2346,1806 v2(-2346,1808.12) ; v1(-2131,1940.16) -2126.16,1945 P6.1
  Top Layer w20: U1.8 U1.9
  Bottom Layer w15: v2(-2346,1808.12) -2346,1806 -2211.84,1940.16 v1(-2131,1940.16)
VCC: C24.1 P5.2 R19.2 U8.2 | length 2851.5
  Top Layer w25: P5.2 -1690,169
  Top Layer w50: -1690,169 -1402,-119 v1(-383,-119)
  Bottom Layer w10: 420.56,573 U8.2@482.9,510.66
  Bottom Layer w13: 183.84,501 C24.1 284.58,537 320.58,573 420.56,573
  Bottom Layer w50: v1(-383,-119) 40,304 R19.2 126.17,443.32 183.84,501
VLEFT: P6.3 U5.3 | length 299.7
  Top Layer w15: P6.3 -1931.33,1749.83 -1889.5,1708 U5.3
VREF: C10.1 C11.1 P6.4 R4.1 R5.1 R9.1 R13.1 R14.1 U1.5 U1.13 U1.14 U5.5 | length 3789.9
  Top Layer w15: U1.5 v2(-2977.43,1669) -2919,1727.43 -2919,1793.43 U1.13@-2895,1817.43 ; -2946.9,1950.1 R9.1 R5.1 ; U1.14 v2(-2792.39,1869) -2213.61,1869 v2(-2102.61,1758) U5.5 ; P6.4 -1889,1942 v1(-1759,1942) -1622.69,2078.31 R14.1 C11.1 -1161.31,2170 -700,2170 -649,2119 R13.1 R4.1 -199,2036.42 C10.1
  Top Layer w20: -2946.9,1950.1 U1.14 U1.13
  Bottom Layer w15: v2(-2102.61,1758) -1943,1758 v1(-1759,1942)
VRIGHT: P6.2 U5.2 | length 367.4
  Top Layer w15: P6.2 -1970.67,1736.67 -1892,1658 U5.2
VSIG: R6.2 U3.14 U6.23 | length 2150.4
  Top Layer w15: U3.14 v2(-792.76,1786.9) -770.24,1809.42 R6.2
  Bottom Layer w15: U6.23 -1854.44,568.56 -1854.44,690.56 -1789,756 -1789,815 -1757.65,846.35 -1662.65,846.35 -1162.02,1346.98 -1005.02,1346.98 -910,1442 -910,1669.66 v2(-792.76,1786.9)
VUSB: C18.2 F1.1 P2.1 | length 476.9
  Top Layer w20: P2.1 -183.89,1159.11 -183,1160
  Top Layer w30: -183,1160 v2(-183,1243.51)
  Bottom Layer w15: C18.2 C18.2@-3.25,1389.8
  Bottom Layer w50: v2(-183,1243.51) -3.25,1243.51 C18.2@-3.25,1389.8
XTAL1: C15.2 U6.9 Y1.1 | length 1060
  Bottom Layer w15: C15.2 -3016.94,533 Y1.1 -2869,680.94 -2342.06,680.94 U6.9
XTAL2: C19.2 U6.10 Y1.2 | length 882.8
  Bottom Layer w15: C19.2 -3022.69,719.37 Y1.2 -2391.94,731.06 U6.10
pads on no net: *.0 *.1 *.2 *.3 *.4 *.5 *.6 *.7 *.8 *?.1 *?.2 *?.3 *?.4 *?.5 *?.9 *?.11 *?.15 U4.3 U9.2 U9.3 U9.6 U9.8 U9.9 U9.10 U9.11 U9.12 U9.13 U9.14 U9.22 U9.23 U9.24 U9.27 U9.28
copper on no net: | length 185
  Top Layer w15: -4135,1427 -4135,1612
  other v1: 1765,79 1474,522 -3912,879 2192,1874.1 2257,1874.1 2192,2059.1 2257,2059.1 -4138,2088
  other v3: 2252,1607.8 2458.3,1607.8 2202,1657.8 2504.6,1657.8 2202,2252.8 2504.6,2252.8 2252,2299.1 2458.3,2302.8
  other v5: -2725,0 0,0 -2725,2150 0,2150
  other v7: -3990,1027 -3990,2027

## Polygon pours and split planes (outlines as drawn)
GND on Bottom Layer "BOARD_GND" (solid, remove dead copper, pour order 25): -3662.5,2302 -3662.5,-212 937.5,-212 937.5,2302
VCC on Bottom Layer "VCC" (solid, remove dead copper, pour order 21): 463.49,545 433.58,570 345.58,658 154.58,658 154.58,472.26 154.84,472 323.58,472 323.58,533.11 324.37,533.9 452.39,533.9
VBAT on Bottom Layer "VBAT" (solid, remove dead copper, pour order 19): 756.9,688 756.9,473.32 756.57,473 751.43,478 535.58,478 535.58,494.7 535.96,495.07 535.58,495.44 535.58,515.74 535.58,517 598.28,578 598.28,688
GND on Bottom Layer "PGND" (solid, remove dead copper, pour order 18): 720.49,449 720.49,373 593.06,375.18 568.14,405 528.17,421.65 439.87,421.65 401.19,396.1 218.58,395.68 218.58,407.15 218.84,407.47 218.84,461 456.42,456.68 511.62,456.68 586.83,449
VBAT on Bottom Layer "VBAT" (solid, remove dead copper, pour order 20): 826,1683.37 821.58,1678.95 509,1678.95 509,1554 510,1553 826,1553
GND on Bottom Layer "GND_VSS" (solid, remove dead copper, pour order 22): 826,1936.43 826,1722.44 824.77,1719.6 602.63,1719.6 587.63,1685 515,1685 492,1701.15 382.46,1720.57 327,1724.21 326,1744.97 318.48,1879.49 320.02,2139.42 388,2141 397.22,1879.49 420.95,1758.81 515,1761.12 559,1761.12 575,1798.03 602.63,1798.03 602.63,1857.77 681.37,1857.77 681.37,1934.83 680.68,1936.43
VBUS on Bottom Layer "VDD_CHRG" (solid, remove dead copper, pour order 23): 389,1688 397,1680 468,1680 468,1552 469,1551 235,1551 235,1684 233,1686
VBAT on Bottom Layer "BATT_VBAT" (solid, remove dead copper, pour order 24): 779,1016 780,1015 780,917 603,917 598,912 598.28,912.28 598.28,1016
GND on Bottom Layer "BATT_GND" (solid, remove dead copper, pour order 27): 779,733 595.52,733 594,735.65 598.28,743.11 598.28,930 780,930
AVS on Top Layer "AVS" (solid, remove dead copper, pour order 40): 927,2274.3 927,1203 -3657,1203 -3665,1212.12 -3661,1216.68 -3661,2280
+5V on Top Layer "+5V" (solid, remove dead copper, pour order 17): 937.5,-125 -3662.5,-125 -3662.5,1165 938,1165 941,1162.18
GND on Top Layer "BATT_GND" (solid, remove dead copper, pour order 28): 826,1934.83 826,1722.44 579.96,1722.44 592,1734.48 592,1936.43

## Keep-outs
Keep-Out Layer:
  lines w10: -3662.5,-168 937.5,-168 937.5,2308 -3662.5,2308 -3662.5,-168

## Silkscreen, mask and mechanical layers (free items; w line width, h text height)
Top Overlay:
  lines w10: 995,2373 995,-228 992,-225 -1473,-225 -2588,-225 -3702,-225 -3703,-226 -3703,37 -3703,616 -3703,1054.94 -3703,2005 -3703,2375 997,2375 ; -4240,-23 -3740,-23 -3740,2166 -4240,2166 -4240,-23 ; 1012,-185 1012,1201 2552,1201 2552,-187.5 1014.5,-187.5 1012,-185
Mechanical 2:
  lines w1: -4262.5,-225 -4262.5,2375 2604,2375 2604,-225 -4262.5,-225

## Dimensions
-4262.5,2375 to -4240,2166 on Top Overlay
-4262.5,-225 to -4240,-23 on Top Overlay

## Text inside footprints (layer, text, board x,y; h text height)
*: Top Overlay "4" at 2417.64,2124.1 h60 r90; Top Overlay "3" at 2417,1994.1 h60 r90; Top Overlay "2" at 2417.64,1904.1 h60 r90; Top Overlay "1" at 2417.64,1799.1 h60 r90; Top Overlay "Vref" at 2314,2167.1 h60 r90; Top Overlay "L" at 2527,2124.1 h60 r90; Top Overlay "R" at 2527,1789.1 h60 r90; Top Overlay "VCarr" at 2317,1614.1 h60 r90
*: Bottom Overlay "GND" at 1705,344 h60 r270; Bottom Overlay "ALM" at 1805,342 h60 r270; Bottom Overlay "LED3+" at 1351,-126 h60 r90; Bottom Overlay "LED2+" at 1354,720 h60 r90; Bottom Overlay "+5V" at 2449,-122 h60 r90; Bottom Overlay "LED1+" at 2352,723 h60 r90; Bottom Overlay "GND" at 1463,1008 h60 r270; Bottom Overlay "ALMOUT" at 1563,1008 h60 r270; Bottom Overlay "LED3" at 1668,1008 h60 r270; Bottom Overlay "LED2" at 1766,1008 h60 r270; Bottom Overlay "LED1" at 1864,1008 h60 r270; Bottom Overlay "MONITOREN" at 1962,1008 h60 r270; Bottom Overlay "+5V" at 2073,1008 h60 r270
*?: Top Overlay "GND" at -4075,1715 h60; Top Overlay "DUR2" at -4093,1614 h60; Top Overlay "DUR1" at -4083,1510 h60; Top Overlay "VBAT" at -4088,1410 h60; Top Overlay "+5V" at -4042.78,1311 h60
P1: Top Overlay "1" at -2353,358 h50 r180; Top Overlay "2" at -2333,258 h50 r180; Top Overlay "5" at -2693,358 h50 r180; Top Overlay "6" at -2693,258 h50 r180